# EAGLE board programmer-pcb (EAGLE 7.7.0)
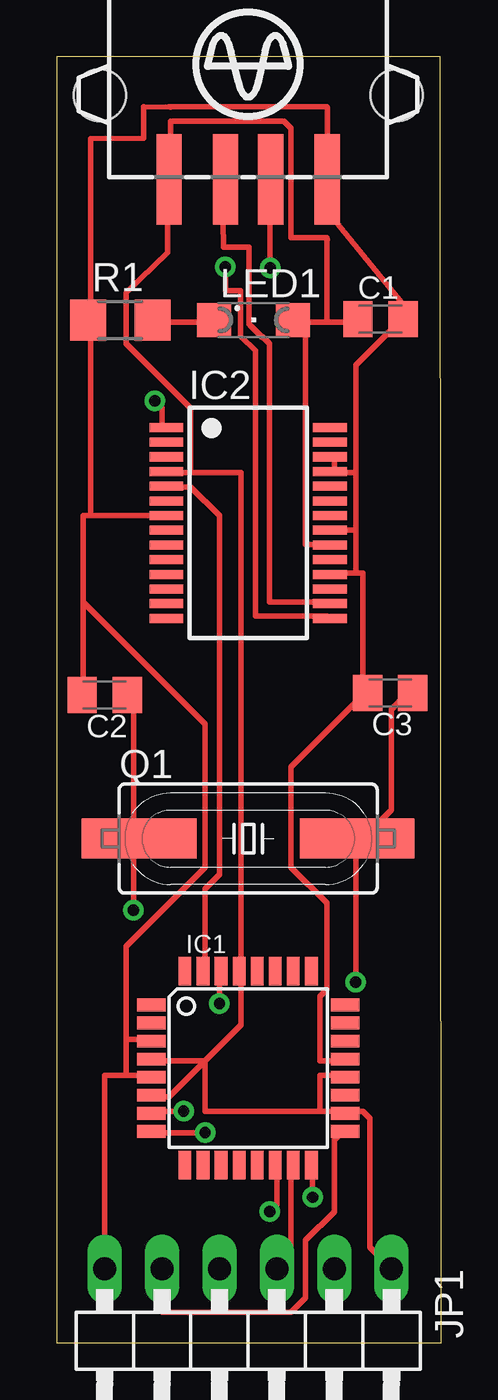
[diagram p0: board, top side]
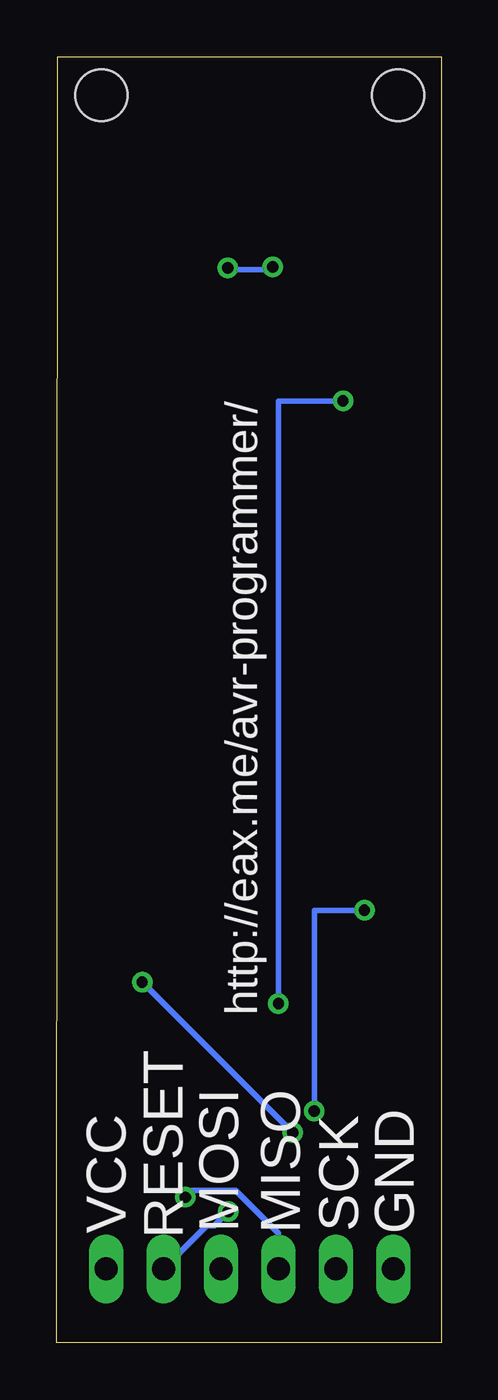
[diagram p1: board, bottom side, seen from below]

Size 17.05 x 56.94 mm. Coordinates in mm from the lower left corner, seen from the top.
Outline: 0,0 17.05,0 17.01,56.94 0,56.94 0,0
Copper layers (1*16): Top 0.035mm / dielectric 1.5mm / Bottom 0.035mm
Design rules "default": minimum track width 10mil, minimum drill 24mil, track to track 8mil, track to pad 8mil, pad to pad 8mil, via to via 8mil, smd to smd 8mil, copper to edge 40mil, drill to drill 8mil, minimum pad ring 10mil, minimum via ring 8mil, stop-mask expansion 4mil, vias tented up to drill 0mil, thermal gap 10mil

## Footprints (pad centres in the part's own frame; a part is rotated, then mirrored left to right if it is on the bottom)
C0805K = smd 1.3 x 1.6: 1 -1,0; 2 1,0
TQFP32-08 = smd 1.27 x 0.559: 1 -4.293,2.8; 2 -4.293,2; 3 -4.293,1.2; 4 -4.293,0.4; 5 -4.293,-0.4; 6 -4.293,-1.2; 7 -4.293,-2; 8 -4.293,-2.8; 17 4.293,-2.8; 18 4.293,-2; 19 4.293,-1.2; 20 4.293,-0.4; 21 4.293,0.4; 22 4.293,1.2; 23 4.293,2; 24 4.293,2.8 | smd 0.559 x 1.27: 9 -2.8,-4.293; 10 -2,-4.293; 11 -1.2,-4.293; 12 -0.4,-4.293; 13 0.4,-4.293; 14 1.2,-4.293; 15 2,-4.293; 16 2.8,-4.293; 25 2.8,4.293; 26 2,4.293; 27 1.2,4.293; 28 0.4,4.293; 29 -0.4,4.293; 30 -1.2,4.293; 31 -2,4.293; 32 -2.8,4.293
SSOP28 = smd 0.4 x 1.5: 1 -4.225,-3.625; 2 -3.575,-3.625; 3 -2.925,-3.625; 4 -2.275,-3.625; 5 -1.625,-3.625; 6 -0.975,-3.625; 7 -0.325,-3.625; 8 0.325,-3.625; 9 0.975,-3.625; 10 1.625,-3.625; 11 2.275,-3.625; 12 2.925,-3.625; 13 3.575,-3.625; 14 4.225,-3.625; 15 4.225,3.625; 16 3.575,3.625; 17 2.925,3.625; 18 2.275,3.625; 19 1.625,3.625; 20 0.975,3.625; 21 0.325,3.625; 22 -0.325,3.625; 23 -0.975,3.625; 24 -1.625,3.625; 25 -2.275,3.625; 26 -2.925,3.625; 27 -3.575,3.625; 28 -4.225,3.625
1X06/90 = drill 1.016 long: 1 -6.35,-3.81; 2 -3.81,-3.81; 3 -1.27,-3.81; 4 1.27,-3.81; 5 3.81,-3.81; 6 6.35,-3.81
SML1206 = smd 1.5 x 1.5: A 1.75,0; C -1.75,0
SM49 = smd 5.08 x 1.778: 1 -4.826,0; 2 4.826,0
R1206 = smd 1.6 x 1.803: 1 -1.422,0; 2 1.422,0
USB-A003 = smd 1.12 x 4: 1 -3.5,14; 2 -1,14; 3 1,14; 4 3.5,14 | hole 2.3: -6.57,10.28; 6.57,10.28

## Placement (x,y rotation side)
C1  100 uF  [C0805K]  14.35,45.32 0 top
C2  22 pF  [C0805K]  2.14,28.68 180 top
C3  22 pF  [C0805K]  14.77,28.77 180 top
IC1  MEGA8-AI  [TQFP32-08]  8.49,12.17 0 top
IC2  FT232RL  [SSOP28]  8.49,36.3 270 top
JP1  [1X06/90]  8.49,-0.53 180 top
LED1  [SML1206]  8.73,45.27 0 top
Q1  16 MHz  [SM49]  8.49,22.33 0 top
R1  1k  [R1206]  2.83,45.27 0 top
X1  [USB-A003]  8.49,65.51 180 top

## Library data of the parts
C1-C3 = rcl
IC1 = atmel; MPN: ATMEGA8-16AU; OC_FARNELL: 9171371; OC_NEWARK: 73M8863
IC2 = ftdichip; MPN: FT232RL; OC_FARNELL: 1146032; OC_NEWARK: 91K9918
JP1 = pinhead
LED1 = led
Q1 = crystal; OC_FARNELL: unknown; OC_NEWARK: unknown
R1 = resistor
X1 = con-yamaichi; OC_FARNELL: unknown; OC_NEWARK: unknown

## Nets
GND: C2.2 IC1.3 IC1.5 IC2.7 JP1.6 R1.1
N$1: LED1.C R1.2
N$2: IC2.16
N$3: IC2.15
N$4: C2.1 IC1.7 Q1.1
N$5: C3.1 IC1.8 Q1.2
N$6: IC1.30 IC2.1
N$7: IC1.31 IC2.5
N$8: IC1.16 JP1.4
N$9: IC1.15 JP1.3
N$10: IC1.14 JP1.2
N$11: IC1.17 JP1.5
S$1: C1.2 C3.2 IC1.21 IC2.18 IC2.21 IC2.25 IC2.26
S$2: X1.4
S$6: C1.1 IC2.20 LED1.A
S$10: X1.1
S$15: X1.3
S$16: X1.2
VCC: IC1.4 IC1.6 IC1.18 IC1.20 IC1.29 IC2.4 JP1.1

## Tracks (layer width: path | path; a pad name or v marks a point on that pad's centre or on a via)
GND
  Top 0.254: 3.09,11.85 2.14,11.85 JP1.6 | 3.09,11.85 4.04,11.85 IC1.5 | 3.09,13.44 4.04,13.44 IC1.3 | 3.09,11.85 3.09,13.44 | 1.5,36.61 1.19,36.61 1.19,32.8 | 1.5,36.61 4.68,36.61 IC2.7 | 1.19,32.8 1.19,28.68 C2.2 | 1.5,36.61 1.5,45.19 R1.1 1.5,45.5 1.5,48.04 | 3.09,13.44 3.09,17.56 6.58,21.06 6.58,27.41 1.19,32.8
N$1
  Top 0.254: LED1.C 6.9,45.19 4.36,45.19 R1.2
N$2
  Top 0.254: 9.12,44.55 9.44,44.23 9.44,32.8 11.98,32.8 IC2.16
N$3
  Top 0.254: 8.17,44.55 8.81,43.92 8.81,32.17 11.98,32.17 IC2.15
N$4  (via drill 0.5)
  Top 0.254: v5.63,10.26 4.36,10.26 IC1.7 | 3.41,22.33 v3.41,19.15 | 3.41,22.33 3.41,28.68 C2.1 | 3.41,22.33 Q1.1
  Bottom 0.254: v5.63,10.26 5.63,19.15 v3.41,19.15
N$5  (via drill 0.5)
  Top 0.254: v6.58,9.31 4.36,9.31 IC1.8 | v13.25,15.98 13.25,22.33 Q1.2 13.57,22.33 14.84,23.6 14.84,28.04 15.47,28.68 C3.1
  Bottom 0.254: v13.25,15.98 v6.58,9.31
N$6  (via drill 0.5)
  Top 0.254: v7.22,15.02 7.22,16.29 IC1.30 | v4.36,41.69 4.68,41.38 4.68,40.42 IC2.1
  Bottom 0.254: v7.22,15.02 7.22,41.69 v4.36,41.69
N$7
  Top 0.254: IC1.31 6.58,16.61 6.58,20.1 7.22,20.74 7.22,36.61 5.95,37.88 5,37.88 IC2.5
N$8  (via drill 0.5)
  Top 0.254: v11.35,6.45 11.35,7.72 IC1.16
  Bottom 0.254: v11.35,6.45 11.03,6.77 9.12,6.77 7.22,4.86 JP1.4
N$9
  Top 0.254: JP1.3 10.39,3.91 10.39,7.72 IC1.15
N$10  (via drill 0.5)
  Top 0.254: v9.44,5.82 9.76,6.13 9.76,7.72 IC1.14
  Bottom 0.254: v9.44,5.82 10.08,5.18 10.39,5.18 JP1.2
N$11
  Top 0.254: JP1.5 4.68,1.37 10.39,1.37 11.03,2.01 11.03,4.55 12.3,5.82 12.3,8.99 12.62,9.31 IC1.17
S$1
  Top 0.254: 15.16,45.5 C1.2 15.16,45.19 13.25,43.28 13.25,38.52 | IC2.26 12.3,39.15 12.3,38.52 | 12.3,38.52 IC2.25 | 13.25,38.52 12.3,38.52 | IC2.21 12.3,35.98 13.25,35.98 | 13.25,35.98 13.25,38.52 | IC2.18 12.3,34.07 13.25,34.07 | 13.25,34.07 13.25,35.98 | 13.25,34.07 13.57,34.07 13.57,28.99 C3.2 13.57,28.68 10.39,25.5 10.39,21.06 11.98,19.47 11.98,15.66 11.66,15.34 11.66,12.48 12.62,12.48 IC1.21
S$2
  Top 0.254: 4.68,51.22 X1.4 5,51.54
S$3
  Top 0.254: 1.51,47.98 1.51,53.31 3.86,53.32 3.86,54.72 5.04,54.7
S$4
  Top 0.254: 4.92,48.31 4.92,49.88
S$5
  Top 0.254: 6.01,54.07 5.05,54.07 5.05,53.17
S$6
  Top 0.254: C1.1 13.25,45.19 11.03,45.19 | 11.03,45.19 10.71,45.19 LED1.A 11.03,45.19 | 11.03,45.19 11.03,35.34 11.98,35.34 IC2.20
S$7
  Top 0.254: 3.11,46.5 4.92,48.26
S$8
  Top 0.254: 10.39,53.12 10.39,53.76 10.08,54.08 5.95,54.08
S$9
  Top 0.254: 10.38,53.06 10.39,53.06 10.39,48.93 11.98,48.93 11.98,48.87
S$10
  Top 0.254: 11.98,51.54 X1.1 11.98,51.22
S$11
  Top 0.254: 11.99,48.82 11.98,48.82 11.98,45.19
S$12
  Top 0.254: 5,54.71 11.98,54.71
S$13
  Top 0.254: 11.98,54.67 12.01,54.67 12.01,53.37
S$14
  Top 0.254: 12.35,49.64 15.46,45.82
S$15
  Top 0.254: 7.54,51.22 X1.3
S$16
  Top 0.254: 9.12,50.9 9.44,51.22 X1.2
S$17  (via drill 0.5)
  other vias: 9.46,47.58
S$18  (via drill 0.5)
  other vias: 7.47,47.63
S$19
  Top 0.254: 7.38,49.63 7.4,48.51 8.53,48.49 8.53,45.09
S$20
  Top 0.254: 8.58,45.06 9.13,44.5
S$21
  Top 0.254: 9.46,49.66 9.46,47.93
S$22
  Top 0.254: 8.15,44.59 8.15,46.57 7.49,46.57 7.49,47.25
S$23
  Bottom 0.254: 9.12,47.51 7.86,47.51 7.86,47.52
S$24
  Top 0.254: 7.5,47.25 7.49,47.25 7.49,47.52
S$25
  Top 0.254: 9.46,47.91 9.46,47.53
S$26
  Bottom 0.254: 7.81,47.49 7.48,47.49 7.48,47.5
S$27
  Bottom 0.254: 9.06,47.5 9.46,47.5 9.46,47.55
VCC
  Top 0.254: 6.58,12.48 8.17,14.07 8.17,16.29 IC1.29 8.17,16.61 8.17,38.52 5.95,38.52 | 6.58,12.48 5,10.9 4.36,10.9 IC1.6 | 6.58,12.48 4.36,12.48 IC1.4 | 11.66,10.26 6.58,10.26 6.58,12.48 | 11.66,10.26 12.62,10.26 IC1.18 12.93,10.26 13.57,10.26 13.89,9.94 13.89,4.23 JP1.1 | 11.66,10.26 11.66,11.85 12.62,11.85 IC1.20 | 5.95,38.52 5,38.52 IC2.4 | 3.09,46.46 3.09,44.23 5.95,41.38 5.95,38.52

## Text on the board
bNames: http://eax.me/avr-programmer/ | RESET | MISO | MOSI | GND | SCK | VCC